# EAGLE board simpleDTMF (EAGLE 4.16)
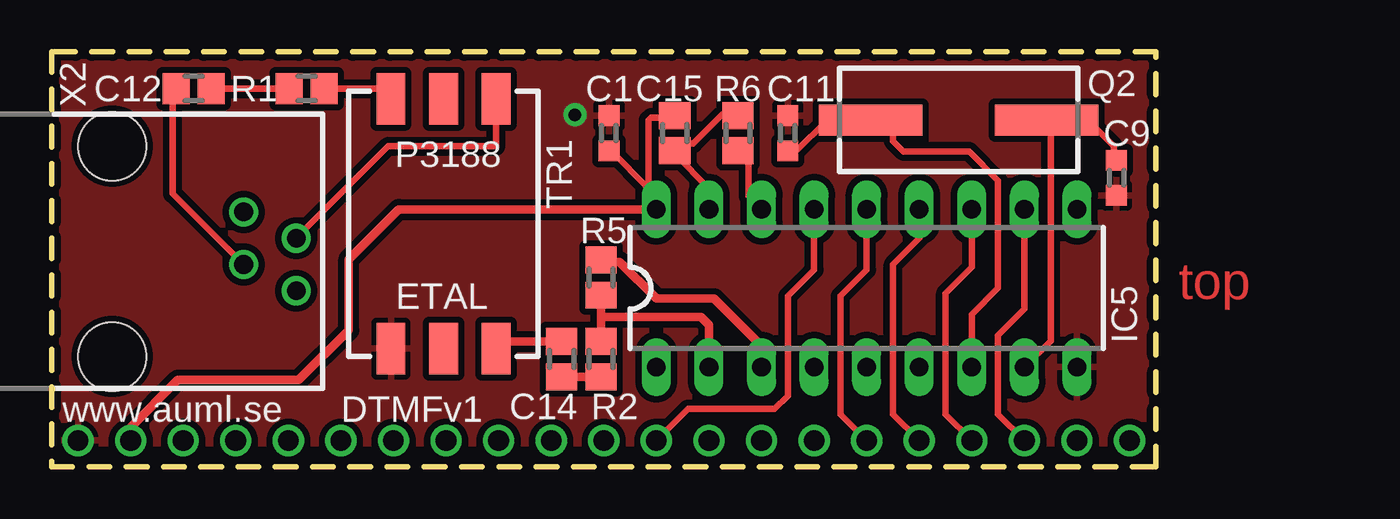
[diagram p0: board, top side]
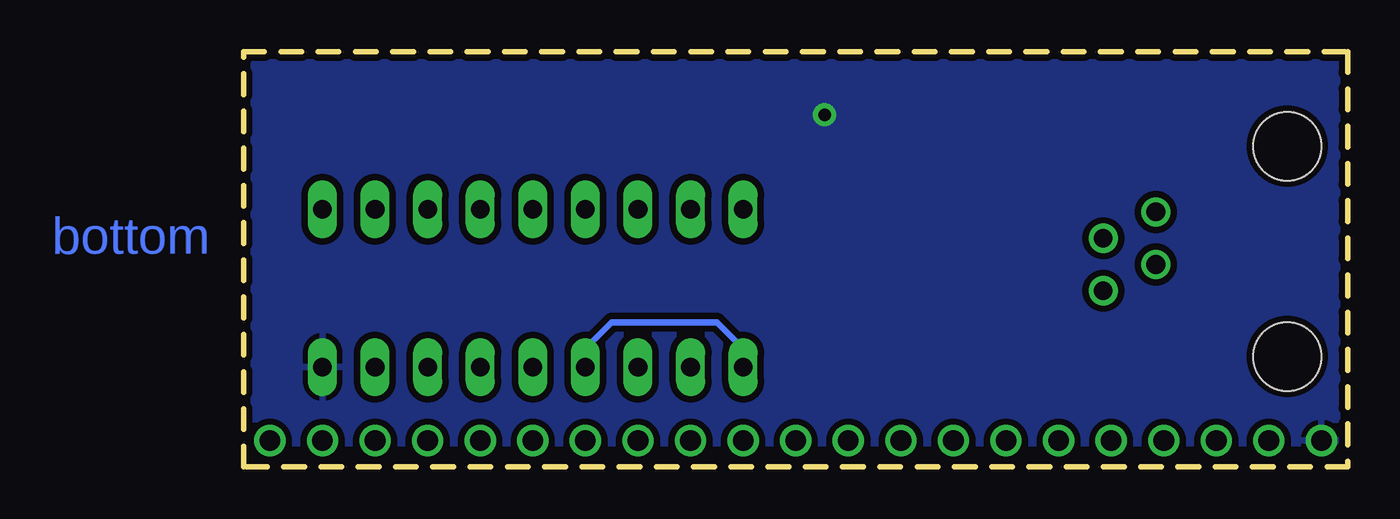
[diagram p1: board, bottom side, seen from below]

Size 53.34 x 20.07 mm. Coordinates in mm from the lower left corner, seen from the top.
Outline: 0,0 53.34,0 53.34,20.07 0,20.07 0,0
Copper layers (1*16): Top 0.035mm / dielectric 1.5mm / Bottom 0.035mm
Design rules "default": minimum track width 10mil, minimum drill 0.6mm, track to track 10mil, track to pad 10mil, pad to pad 10mil, via to via 10mil, smd to smd 8mil, copper to edge 10mil, drill to drill 8mil, minimum pad ring 10mil, minimum via ring 10mil, stop-mask expansion 4mil, vias tented up to drill 0mil, thermal gap 10mil

## Footprints (pad centres in the part's own frame; a part is rotated, then mirrored left to right if it is on the bottom)
C0603 = smd 1 x 1: 1 -0.85,0; 2 0.85,0
C0805 = smd 1.3 x 1.5: 1 -0.85,0; 2 0.85,0
DIL18 = drill 0.9 long: 1 -10.16,-3.81; 2 -7.62,-3.81; 3 -5.08,-3.81; 4 -2.54,-3.81; 5 0,-3.81; 6 2.54,-3.81; 7 5.08,-3.81; 8 7.62,-3.81; 9 10.16,-3.81; 10 10.16,3.81; 11 7.62,3.81; 12 5.08,3.81; 13 2.54,3.81; 14 0,3.81; 15 -2.54,3.81; 16 -5.08,3.81; 17 -7.62,3.81; 18 -10.16,3.81
SMD = smd 5 x 1.5: P$1 4.25,0; P$2 -4.25,0
R0805 = smd 1.3 x 1.5: 1 -0.85,0; 2 0.85,0
ETAL_P3188 = smd 1.4 x 2.5: 1 0,-5.08; 2 2.54,-5.08; 3 5.08,-5.08; 4 5.08,6.985; 5 2.54,6.985; 6 0,6.985
FCI6/4 = drill 0.9 round: 1 -8.636,-2.794; 2 -7.366,-0.254; 3 -6.096,-2.794; 4 -4.826,-0.254 | hole 3.3: -11.811,-9.144; -1.651,-9.144
CORE_IOHEAD_NOSILC = drill 1 round: 1 25.4,0; 2 22.86,0; 3 20.32,0; 4 17.78,0; 5 15.24,0; 6 12.7,0; 7 10.16,0; 8 7.62,0; 9 5.08,0; 10 2.54,0; 11 0,0; 12 -2.54,0; 13 -5.08,0; 14 -7.62,0; 15 -10.16,0; 16 -12.7,0; 17 -15.24,0; 18 -17.78,0; 19 -20.32,0; 20 -22.86,0; 21 -25.4,0

## Placement (x,y rotation side)
C1  100n  [C0603]  26.92,16.13 90 top
C9  [C0603]  51.44,13.97 270 top
C11  [C0603]  35.56,16.13 90 top
C12  100n  [C0805]  6.86,18.29 0 top
C14  100n  [C0805]  24.64,5.21 270 top
C15  100n  [C0805]  30.1,16.13 270 top
IC5  MT8870DIL  [DIL18]  39.37,8.64 0 top
Q2  3.5795M  [SMD]  43.81,16.76 180 top
R1  2k7  [R0805]  12.32,18.29 180 top
R2  100k  [R0805]  26.54,5.21 270 top
R5  100k  [R0805]  26.54,9.14 270 top
R6  300k  [R0805]  33.15,16.13 270 top
TR1  ETAL_P3188  [ETAL_P3188]  21.46,12.7 180 top
X2  FCI6/4  [FCI6/4]  12.06,3.68 270 top
X3  CORE_IOHEADEXP  [CORE_IOHEAD_NOSILC]  26.67,1.27 0 bottom

## Library data of the parts
C1 C9 C11 C12 C14 C15 R1 R2 R5 R6 = rcl
IC5 = mitel-mt8870
Q2 = hc49-4h-smx
TR1 = etal_trafo
X2 = fci-modular
X3 = expboard

## Nets
EXP_A: X3.4
EXP_B: X3.5
EXP_C: X3.6
EXP_D: X3.7
EXP_E: X3.8
EXP_F: X3.9
EXP_G: X3.10
EXP_H: X3.11
EXP_J: X3.13
EXP_K: X3.14
EXP_L: X3.15
EXP_Q: X3.20
EXP_R: X3.21
GND: C1.2 C9.2 C11.2 IC5.9 TR1.4 X3.1
N$3: C11.1 IC5.7 Q2.P$1
N$4: C9.1 IC5.8 Q2.P$2
N$5: IC5.16 R6.2
N$6: C15.2 IC5.17 R6.1
N$9: R1.1 TR1.3
N$10: C12.2 R1.2
N$11: C12.1 X2.3
N$14: TR1.1 X2.2
N$15: C14.1 TR1.6
N$16: C14.2 R2.2
N$17: IC5.2 R2.1 R5.2
N$18: IC5.3 R5.1
N$19: IC5.1 IC5.4
Q1: IC5.11 X3.19
Q2: IC5.12 X3.18
Q3: IC5.13 X3.17
Q4: IC5.14 X3.16
STD: IC5.15 X3.12
V_CAN: X3.3
VCC: C1.1 C15.1 IC5.18 X3.2

## Tracks (layer width: path | path; a pad name or v marks a point on that pad's centre or on a via)
GND  (via drill 0.6)
  other vias: 25.27,17.02
  pour Bottom (isolate 0.305, rank 3): 0,20.07 53.34,20.07 53.34,1.14 0,1.14
  pour Top (isolate 0.305, rank 3): 0,20.07 53.34,20.07 53.34,1.14 0,1.14
N$3
  Top 0.305: C11.1 35.65,15.28 35.69,15.24 35.94,15.24 37.47,16.76 39.37,16.76 39.5,16.64 39.56,16.7 Q2.P$1 40.64,16.76 40.64,15.75 41.15,15.24 44.32,15.24 45.72,13.84 45.72,8.64 44.45,7.37 IC5.7
N$4
  Top 0.305: 48.26,16.64 48.19,16.64 Q2.P$2 | IC5.8 48.26,6.1 48.26,16.64 | 48.26,16.64 50.16,16.64 51.31,15.49 51.31,14.86 51.4,14.86 C9.1
N$5
  Top 0.305: IC5.16 33.66,13.08 33.66,15.11 33.53,15.24 33.15,15.24 R6.2
N$6
  Top 0.305: IC5.17 31.75,13.46 30.1,15.11 C15.2 30.44,15.62 30.99,15.62 32.38,17.02 33.15,17.02 R6.1
N$9
  Top 0.305: TR1.3 16.38,18.29 R1.1
N$10
  Top 0.305: 11.6,18.29 11.68,18.29 | 11.6,18.29 R1.2 | 7.45,18.29 C12.2 11.6,18.29
N$11
  Top 0.305: C12.1 5.84,18.41 5.84,13.21 X2.3
N$14
  Top 0.305: X2.2 16.26,15.49 21.46,15.49 TR1.1
N$15
  Top 0.406: TR1.6 21.46,5.97 21.55,6.06 C14.1
N$16
  Top 0.406: C14.2 24.64,4.32 24.68,4.36 R2.2
N$17
  Top 0.406: 26.54,5.97 R2.1 26.54,7.24 | 26.54,7.24 R5.2 | IC5.2 31.75,6.86 31.37,7.24 26.54,7.24
N$18
  Top 0.406: IC5.3 34.29,5.84 32,8.13 29.21,8.13 27.43,9.91 26.67,9.91 26.58,9.87 R5.1
N$19
  Bottom 0.305: IC5.1 29.21,5.71 30.48,6.99 35.56,6.99 36.83,5.71 IC5.4
Q1
  Top 0.305: IC5.11 46.99,7.62 45.72,6.35 45.72,2.54 X3.19
Q2
  Top 0.305: IC5.12 44.45,9.65 43.18,8.38 43.18,2.54 X3.18
Q3
  Top 0.305: IC5.13 41.91,11.05 40.64,9.78 40.64,2.54 X3.17
Q4
  Top 0.305: IC5.14 39.37,9.53 38.1,8.26 38.1,2.54 X3.16
STD
  Top 0.305: X3.12 30.73,2.79 34.92,2.79 35.56,3.43 35.56,8.26 36.83,9.53 IC5.15
VCC
  Top 0.305: 27.27,15.62 C1.1 27.01,15.28 28.83,13.46 | C15.1 30.1,16.89 28.96,16.89 28.83,16.76 28.83,13.46 | 28.83,13.46 29.21,13.08 IC5.18
  Top 0.406: X3.2 3.81,1.91 6.1,4.19 11.94,4.19 14.35,6.6 14.35,10.03 16.76,12.45 IC5.18

## Text on the board
Top: top
Bottom: bottom
tPlace: www.auml.se | DTMF | v1
tStop: top
bStop: bottom
Document: Top is component side | Expansion will be mounted bottom to bottom with CoreCard